# Altium PCB Projekt91_v4.PcbDoc
Units mil, origin at the board's own origin, x right, y up, seen from the top; angles counter-clockwise.
Board outline 5314.96 x 2952.76 mil, 2 copper layers (Top Layer, Bottom Layer); 46 components, 48 nets, 284 pads, 30 vias.
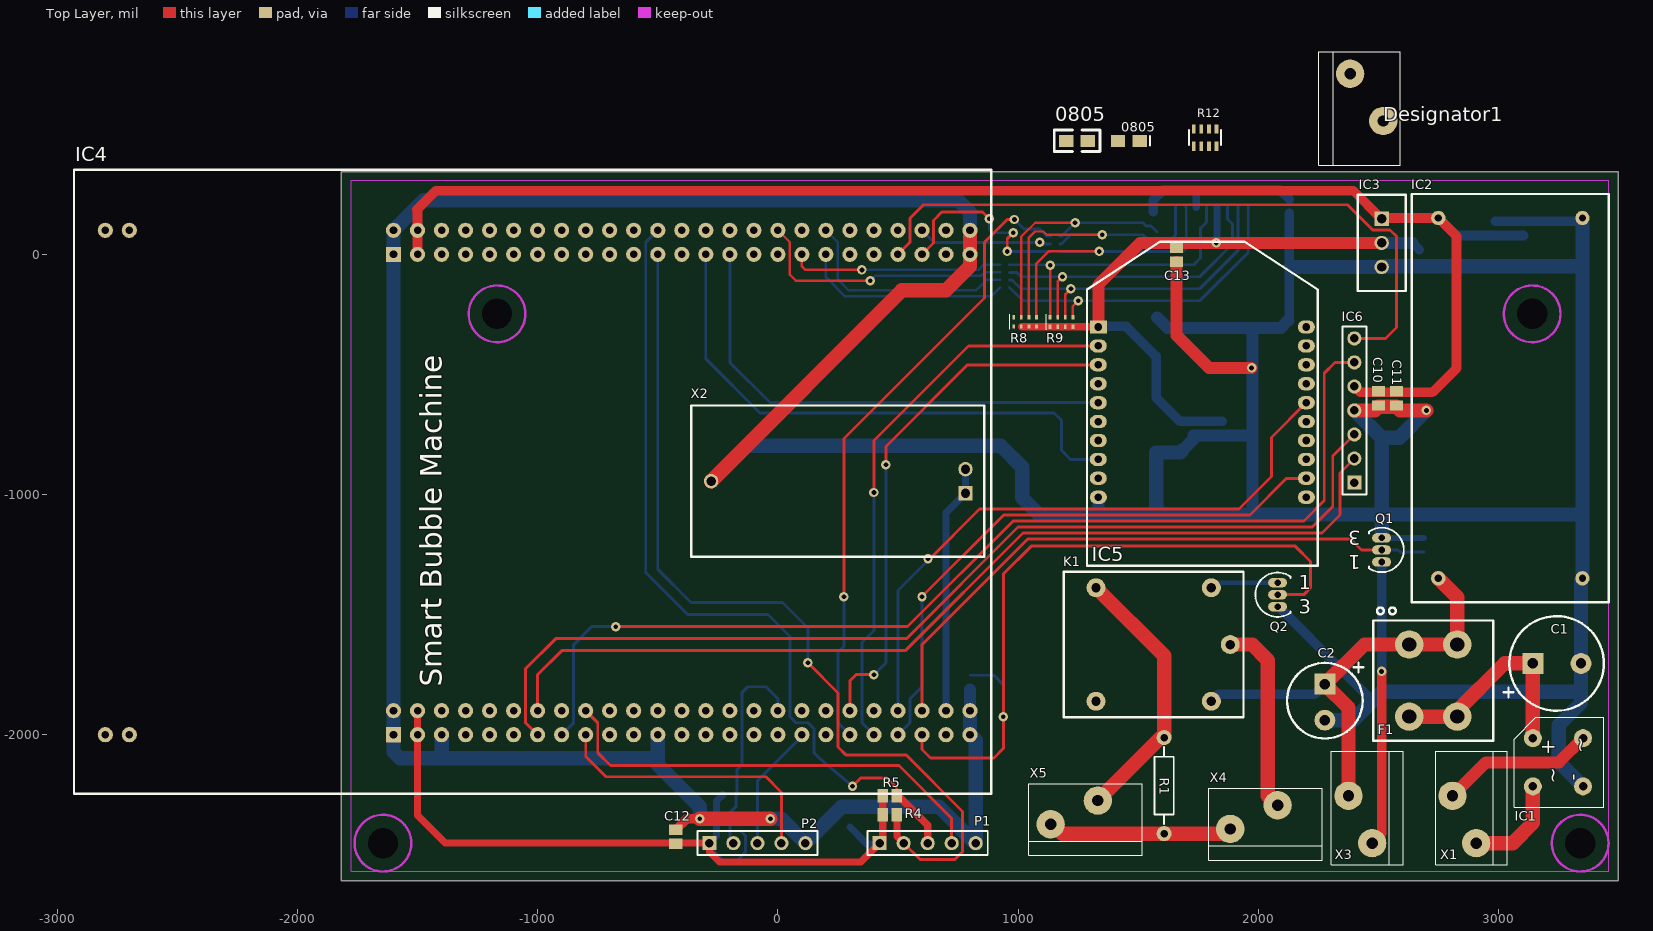
[diagram p0: Top Layer view]
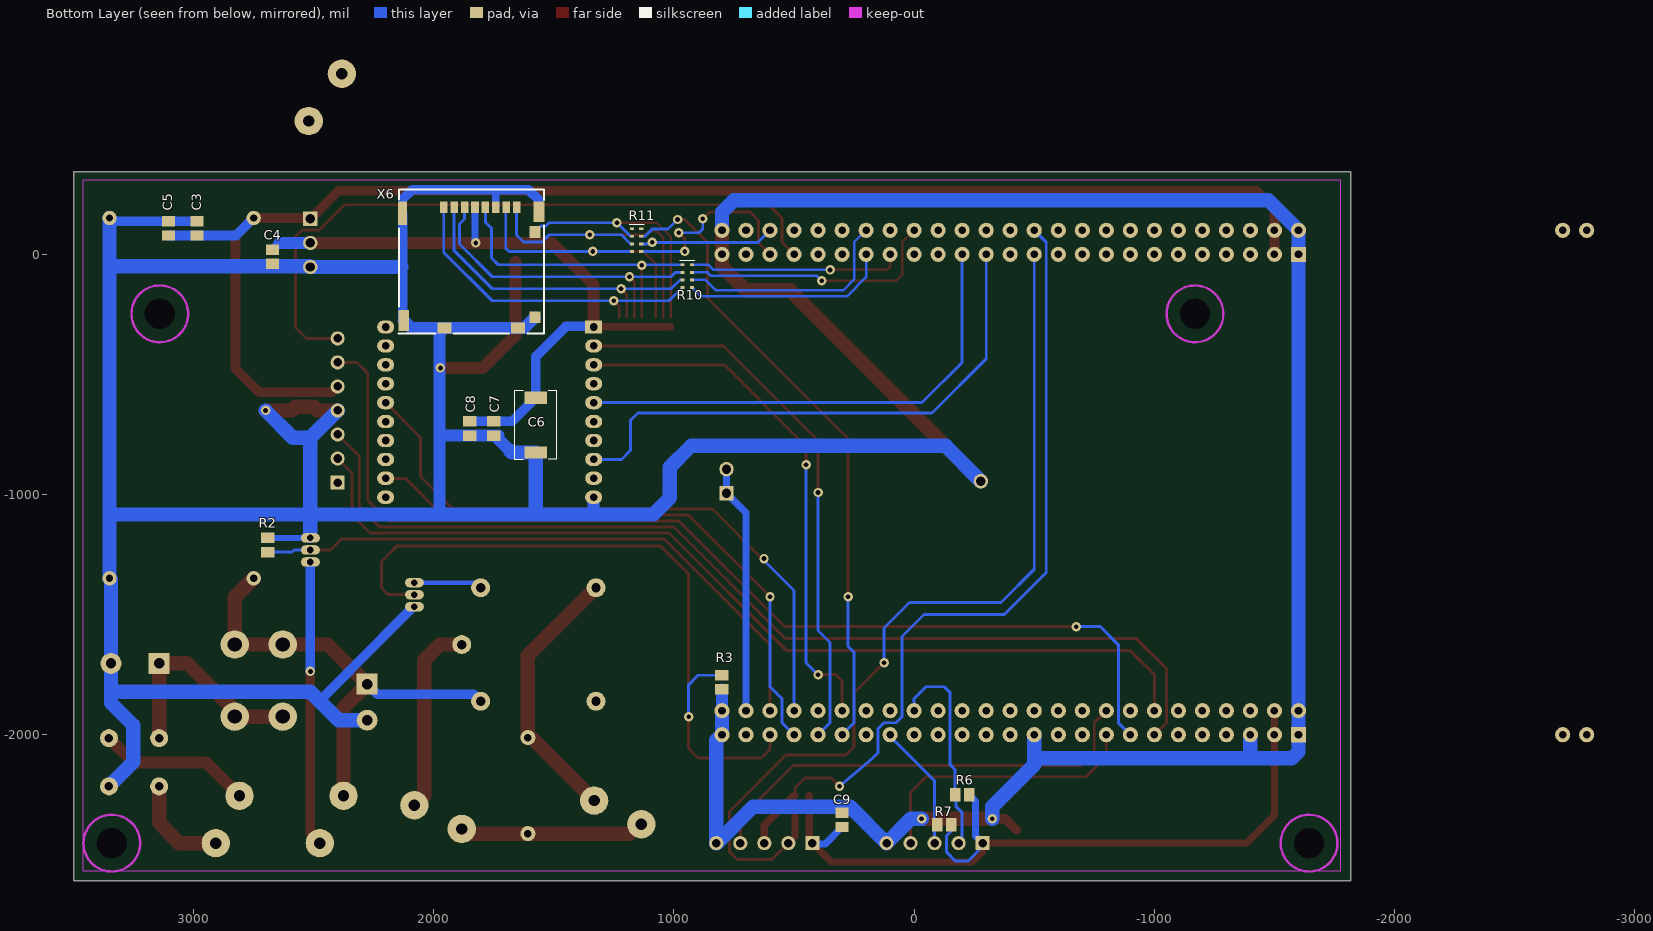
[diagram p1: Bottom Layer view, seen from below]

## Layer stack, top to bottom
Top Layer: signal copper 1.4
Dielectric: dielectric 12.6, FR-4, Dk 4.8
Bottom Layer: signal copper 1.4

## Board outline
-1817.32,-2608.66 -1817.32,344.09 3497.64,344.09 3497.64,-2608.66

## Design rules (kind name [scope] priority, off if disabled: settings)
Clearance 220V [(InNet('220V1') OR InNet('220V2') OR InNet('220V3'))] p1 off: gap=118.11 // 4mm Clearance between 220V tracks
Clearance Clearance_1 [All] p2: gap=8
ComponentClearance [All] p1 off: gap=10 collisioncheckmode=3 verticalgap=10
HoleSize [All] p1: absolutevalues=TRUE maxlimit=1000 minlimit=0.98 maxpercent=80.000 minpercent=20.000
PolygonConnect [All] p1: connectstyle=Relief reliefconductorwidth=10 reliefentries=4 polygonreliefangle="90 Angle"
RoutingVias [All] p1: holewidth=19.68 width=39.37 viastyle="Through Hole" minholewidth=11.81 minwidth=11.81 maxholewidth=196.85 maxwidth=118.11
SolderMaskExpansion [All] p1: expansion=4
TestPointUsage FabricationTestPointUsage [All] p1: valid=0 allowmultiple=FALSE
Testpoint FabricationTestpoint [All] p1: side=3 testpointundercomponent=TRUE minsize=40 maxsize=100 preferedsize=60 minholesize=0 maxholesize=40 preferedholesize=32 testpointgrid=1 style=297 order=0-112345678
Width [All] p1: maxlimit=60 minlimit=10 preferedwidth=10
17 further rules are at their usual default settings.

## Classes and differential pairs
component class Projekt91: C1 C2 C3 C4 C5 C6 C7 C8 C9 C10 C11 C12 C13 F1 IC1 IC2 IC3 IC4 IC5 IC6 K1 P1 P2 Q1 Q2 R1 R2 R3 R4 R5 R6 R7 R8 R9 R10 R11 X1 X2 X3 X4 X5 X6

## Components (designator, comment, footprint, x,y, rotation, side; value= is the part's Value field where it differs from the comment)
0805 "10u" 0805-S 1505.91,472.44 r180 top (schematic designator C3)
0805 "Comment" 0805 1200.79,472.44 r0 top
C1 "Cap Pol1" rad-5 3143.31,-1703.15 r0 top
C2 "100u" RAD-3.5 2277.17,-1789.37 r270 top
C3 "10u" C0805 2985.83,107.87 r90 bottom
C4 "10u" C0805 2670.87,-10.24 r270 bottom
C5 "22u" C0805 3103.94,107.87 r270 bottom
C6 "220u/Ta/low ESR" D_case 1575,-596.65 r270 bottom
C7 "100n" C0805 1750,-725 r90 bottom
C8 "22u" C0805 1850,-725 r90 bottom
C9 "100n" C0805 300,-2354.53 r270 bottom
C10 "10u" c0805 2500,-600 r90 top
C11 "100n" C0805 2575,-600 r90 top
C12 "100n" C0805 -425,-2425 r270 top
C13 "100n" C0805 1660,-1.5 r90 top
Designator1 "PTSA_3.5MM_x2" PTSA_3.5MM_x2 2520,555 r0 top
F1 "FUSE-FPG4, 1.6 AF" FUSE-FPG4 2828.35,-1924.41 r180 top
IC1 "12VDC" graetz2 3143.31,-2214.96 r90 top
IC2 "Regulator 12V5V" regulator 3459.61,-1448.82 r180 top
IC3 "LM1085" TO-220 2513.39,147.24 r0 top
IC4 "STM32F4DISCOVERY" STM32F4DISC_BACK 888.32,-2245.8 r90 top
IC5 "RN_XV_WiFly" RN-XV 1288,-1296.22 r90 top
IC6 "Header 7" HDR1X7 2400,-950 r90 top
K1 "Relay-SPDT" relay 1804.72,-1860.63 r180 top
P1 "Header 5" HDR1X5 423.62,-2451.18 r0 top
P2 "Header 5" HDR1X5 -285.04,-2451.18 r0 top
Q1 "Power nMOS - BS170" to-92 2513.39,-1230.71 r180 top
Q2 "Power nMOS - BS170" to-92 2080.32,-1416.93 r0 top
R1 "1M/500 V" AXIAL-0.4 1607.88,-2211.81 r270 top
R2 "10k" C0805 2690.55,-1210.24 r90 bottom
R3 "10k" C0805 800.79,-1781.89 r270 bottom
R4 "10k" C0805 466.14,-2333.07 r0 top
R5 "10k" C0805 466.14,-2254.33 r0 top
R6 "10k" C0805 -200,-2250 r0 bottom
R7 "10k" C0805 -125,-2375 r0 bottom
R8 "ResNet4" resnet4 982.01,-261.5 r0 top
R9 "ResNet4" resnet4 1133.5,-262.13 r0 top
R10 "ResNet4" resnet4 925,-43.5 r270 bottom
R11 "ResNet4" resnet4 1135.63,106.5 r270 bottom
R12 "EXB38V473JV" RES_NETWORK_x4_0603 1731.3,521.65 r0 top (schematic designator R6)
X1 "PTSA 1.5/2-3,5-Z" PTSA_2.5MM_x2 2808.66,-2254.33 r180 top
X2 "BAT_Holder" BAT_Holder 781.1,-944.49 r180 top
X3 "PTSA 1.5/2-3,5-Z" PTSA_2.5MM_x2 2375.59,-2254.33 r180 top
X4 "PTSA 1.5/2-3,5-Z" PTSA_2.5MM_x2 2080.32,-2293.7 r90 top
X5 "PTSA 1.5/2-3,5-Z" PTSA_2.5MM_x2 1332.28,-2274.02 r90 top
X6 "SD_CARD_MOLEX" MOLEX-MICROSD-503182-1853 1958.07,195.87 r180 bottom

## Footprints (in the part's own frame and the unit in brackets; to place one, negate y for a bottom-side part, rotate by r counter-clockwise, add the part's x,y. Pads: shape width x height; smd on the part's side, far side on the other; paste and mask are expansions set on the pad)
0805 [mil]
  rect 60x50 smd: 1(0,0) 2(90,0)
  silkscreen extent -50,-45 140,45
0805-S [mil]
  rect 60x50 smd: 1(0,0) 2(90,0)
  silkscreen extent -44,-20 -44,20
AXIAL-0.4 [mm] "Axial Device, Thru-Hole; 2 Leads; 0.4 in Pin Spacing"
  round 1.6 hole 0.8: 1(-5.08,0) 2(5.08,0)
  silkscreen extent -4.06,-1.02 4.06,1.02
BAT_Holder [mil] "Holder for CR2032 by Renata"
  rect 60x60 hole 39.37: 1(0,50)
  round 60 hole 39.37: 2(0,-50) 3(1059.06,0)
  silkscreen extent -79,-315 1142,315
C0805 [mm] "Chip Capacitor, Body 2.0x1.3mm, IPC High Density"
  rect 1.1x1.4 smd: 1(-0.75,0) 2(0.75,0)
  body extent -1.1,-0.72 1.1,0.72, height 1.4
c0805 [mm] "Chip Capacitor, Body 2.0x1.3mm, IPC High Density"
  rect 1.1x1.4 smd: 1(-0.75,0) 2(0.75,0)
  body extent -1.1,-0.72 1.1,0.72, height 1.4
D_case [mm]
  rect 1.3x2.4 smd: 1(0,0) 2(5.8,0)
  silkscreen extent -0.75,-2.25 6.55,2.22
FUSE-FPG4 [mm]
  round 3 hole 1.5: 1(0,0) 2(5.08,0) 3(5.08,-7.62) 4(0,-7.62)
  silkscreen extent -3.81,-11.53 8.89,2.54
graetz2 [mm]
  round 1.9 hole 0.9: 1(5.1,0) 2(0,0) 3(0,-5.3) 4(5.1,-5.3)
  silkscreen extent -2.2,-7.5 7.3,2
HDR1X5 [mm] "Connector; Header; 5 Position"
  rect 1.5x1.5 hole 0.9: 1(0,0)
  round 1.5 hole 0.9: 2(2.54,0) 3(5.08,0) 4(7.62,0) 5(10.16,0)
  silkscreen extent -1.27,-1.27 11.43,1.27
HDR1X7 [mm] "Connector; Header; 7 Position"
  rect 1.5x1.5 hole 0.9: 1(0,0)
  round 1.5 hole 0.9: 2(2.54,0) 3(5.08,0) 4(7.62,0) 5(10.16,0) 6(12.7,0) 7(15.24,0)
  silkscreen extent -1.27,-1.27 16.51,1.27
MOLEX-MICROSD-503182-1853 [mm]
  rect 0.8x1.24 smd: 1(0,0) 2(1.1,0) 3(2.2,0) 4(3.3,0) 5(4.4,0) 6(5.5,0) 7(6.6,0) 8(7.7,0)
  rect 1.16x1.25 smd: 9(9.64,-2.63)
  rect 1.16x1.2 smd: 10(9.64,-11.63)
  rect 0.95x2.5 smd: 11(-4.35,-0.63)
  rect 1.15x2.2 smd: 12(10.05,-0.47) 13(-4.24,-11.96)
  rect 1.5x1.15 smd: 14(0.06,-12.76) 15(7.85,-12.75)
  silkscreen extent -4.78,-13.33 10.59,1.87
PTSA_2.5MM_x2 [mm]
  round 3 hole 1.2: 1(0,0) 2(-2.5,5)
  silkscreen extent -5.8,-4.7 1.8,7.3
PTSA_3.5MM_x2 [mm]
  round 3 hole 1.2: 1(0,0) 2(-3.5,5)
  silkscreen extent -6.8,-4.7 1.8,7.3
RAD-3.5 [mm] "Radial 3.5mm; 8mm diameter"
  rect 2.2x2.2 hole 1.1: 1(0,0)
  round 2.2 hole 1.1: 2(3.81,0)
  silkscreen extent -2.27,-4 5.75,4.05
rad-5 [mm] "Radial 5mm; 10mm diameter"
  rect 2.2x2.2 hole 1.1: 1(0,0)
  round 2.2 hole 1.1: 2(5.08,0)
  silkscreen extent -3.09,-5 7.5,5
regulator [mil]
  round 60 hole 30: 1(710,-100) 2(110,-100) 3(710,-1600) 4(110,-1600)
  silkscreen extent 0,-1700 820,0
relay [mm]
  round 2 hole 1: 1(-2,-6) 2(12.2,0) 3(12.2,-12) 4(0,0) 5(0,-12)
  silkscreen extent -3.4,-13.7 15.6,1.7
RES_NETWORK_x4_0603 [mm]
  rect 0.4x1 smd: 1(0,0) 2(0.8,0) 3(1.6,0) 4(2.4,0) 5(2.4,-1.801) 6(1.6,-1.801) 7(0.8,-1.801) 8(0,-1.801)
  silkscreen extent -0.5,-1.7 2.88,-0.1
resnet4 [mm]
  rect 0.3x0.45 smd: 1(0,0) 2(0.8,0) 3(1.6,0) 4(2.4,0) 5(0,-1) 6(0.8,-1) 7(1.6,-1) 8(2.4,-1)
  silkscreen extent -0.4,-1.3 -0.4,0.3
RN-XV [mm] "RN-XV WiFly Pinout"
  rect 1.4x1.8 hole 0.8: 1(25.239,-1.165)
  oval 1.4x1.8 hole 0.8: 2(23.239,-1.165) 3(21.239,-1.165) 4(19.239,-1.165) 5(17.239,-1.165) 6(15.239,-1.165) 7(13.239,-1.165) 8(11.239,-1.165) 9(9.239,-1.165) 10(7.239,-1.168) 11(7.239,-23.165) 12(9.239,-23.165) 13(11.239,-23.165) 14(13.239,-23.165) 15(15.239,-23.165) 16(17.239,-23.165) 17(19.239,-23.165) 18(21.239,-23.165) 19(23.239,-23.165) 20(25.239,-23.165)
  silkscreen extent -0.03,-24.36 34.26,0.03
STM32F4DISC_BACK [mm] "STM32F4Discovery without pins [101..106]"
  rect 1.6x1.6 hole 0.8: 1(6.243,63.203) 51(57.043,63.203)
  round 1.6 hole 0.8: 2(8.783,63.203) 3(6.243,60.663) 4(8.783,60.663) 5(6.243,58.123) 6(8.783,58.123) 7(6.243,55.583) 8(8.783,55.583) 9(6.243,53.043) 10(8.783,53.043) 11(6.243,50.503) 12(8.783,50.503) 13(6.243,47.963) 14(8.783,47.963) 15(6.243,45.423) 16(8.783,45.423) 17(6.243,42.883) 18(8.783,42.883) 19(6.243,40.343) 20(8.783,40.343) 21(6.243,37.803) 22(8.783,37.803) 23(6.243,35.263) 24(8.783,35.263) 25(6.243,32.723) 26(8.783,32.723) 27(6.243,30.183) 28(8.783,30.183) 29(6.243,27.643) 30(8.783,27.643) 31(6.243,25.103) 32(8.783,25.103) 33(6.243,22.563) 34(8.783,22.563) 35(6.243,20.023) 36(8.783,20.023) 37(6.243,17.483) 38(8.783,17.483) 39(6.243,14.943) 40(8.783,14.943) 41(6.243,12.403) 42(8.783,12.403) 43(6.243,9.863) 44(8.783,9.863) 45(6.243,7.323) 46(8.783,7.323) 47(6.243,4.783) 48(8.783,4.783) 49(6.243,2.243) 50(8.783,2.243) 52(59.583,63.203) 53(57.043,60.663) 54(59.583,60.663) 55(57.043,58.123) 56(59.583,58.123) 57(57.043,55.583) 58(59.583,55.583) 59(57.043,53.043) 60(59.583,53.043) 61(57.043,50.503) 62(59.583,50.503) 63(57.043,47.963) 64(59.583,47.963) 65(57.043,45.423) 66(59.583,45.423) 67(57.043,42.883) 68(59.583,42.883) 69(57.043,40.343) 70(59.583,40.343) 71(57.043,37.803) 72(59.583,37.803) 73(57.043,35.263) 74(59.583,35.263) 75(57.043,32.723) 76(59.583,32.723) 77(57.043,30.183) 78(59.583,30.183) 79(57.043,27.643) 80(59.583,27.643) 81(57.043,25.103) 82(59.583,25.103) 83(57.043,22.563) 84(59.583,22.563) 85(57.043,20.023) 86(59.583,20.023) 87(57.043,17.483) 88(59.583,17.483) 89(57.043,14.943) 90(59.583,14.943) 91(57.043,12.403) 92(59.583,12.403) 93(57.043,9.863) 94(59.583,9.863) 95(57.043,7.323) 96(59.583,7.323) 97(57.043,4.783) 98(59.583,4.783) 99(57.043,2.243) 100(59.583,2.243) 101(6.243,91.143) 102(6.243,93.683) 103(59.583,91.143) 104(59.583,93.683)
  silkscreen extent -0.01,-0.01 65.99,96.99
to-92 [mm] "TO, Flat Index; 3 In-Line, Axial Leads; Body Dia. 4.6mm; Leads 0.41 x 0.39 mm (max)"
  oval 2x1 hole 0.7: 1(0,1.27) 2(0,0) 3(0,-1.27)
  silkscreen extent -2.34,-2.34 1.35,2.34
TO-220 [mil]
  rect 60x60 hole 39.37: 1(0,0)
  round 60 hole 39.37: 2(0,-100) 3(0,-200)
  silkscreen extent -100,-300 100,100

## Part data
0805 C5 C7 C8 C9 C10 C11 C12 C13: library part Cap, "Capacitor"
C1: "Polarized Capacitor (Radial)"
C2 C6: library part "Cap Pol1", "Polarized Capacitor (Radial)"
C3 C4: library part "Cap Pol3", "Polarized Capacitor (Surface Mount)"
F1: library part FUSE-FPG4
IC1: library part Bridge2, "Diode Bridge"
IC2: library part Regulator
IC4: library part STM32F4DISC_w/o[101..106]
IC6: "Header, 7-Pin"
K1: "Single-Pole Dual-Throw Relay"
P1 P2: "Header, 5-Pin"
Q1 Q2: library part MOSFET-N, "N-Channel MOSFET"
R1 R2 R3 R4 R5 R6 R7: library part Res2, "Resistor"
R12: library part RES_NETWORK_x4
X1 X3 X4 X5: library part "Header 2", "Header, 2-Pin"

## Free pads (board coordinates)
  round 118.11 hole 125.98: 0(-1644.09,-2451.18) 0(-1169.09,-247.83) 0(3140.16,-247.83) 0(3340.16,-2451.18) 0(3340.16,-2451.18)

## Via types
v1: diameter 39.37, hole 19.68, Top Layer to Bottom Layer, 30 vias

## Nets (pads, with @x,y where several pads share a name; then routed paths per layer and width w, separated by ;. In a path a pad name is that pad's centre, name@x,y a point inside that pad or via, vN(x,y) a via of type N, cw(c..) or ccw(c..) an arc to the next point about the centre after c; other vN are vias at no path point)
220V1: K1.1 X4.1 | length 804.1
  Top Layer w60: K1.1 1974.41,-1624.41 2040,-1690 2040,-2253.39 X4.1
220V2: R1.2 X4.2 X5.2 | length 772.5
  Top Layer w60: X5.2 1145.28,-2372.44 1184.65,-2411.81 R1.2 1863.78,-2411.81 X4.2
220V3: K1.3 R1.1 X5.1 | length 1112.7
  Top Layer w60: K1.3 1607.87,-1671.65 R1.1@1607.87,-1999.3 ; X5.1 1594.49,-2011.81 R1.1
+3.3V: C9.2 C12.2 IC4.3 IC4.4 P1.1 P2.1 R4.1 R5.1 R6.1 R7.1 | length 3373.8
  Top Layer w30: IC4.4 -1500,-2335.43 -1384.25,-2451.18 P2.1 -285.04,-2487.4 -242.52,-2529.92 344.88,-2529.92 436.61,-2438.19 R5.1
  Bottom Layer w12: P2.1@-285.04,-2464.96 -225,-2525 -171.02,-2525 -135.51,-2489.49 -135.51,-2419.49 R7.1@-154.53,-2400.47
  Bottom Layer w20: P2.1@-285.04,-2464.96 P2.1
  Bottom Layer w30: P2.1 -255,-2421.14 -255,-2275.47 R6.1 ; C9.2 370.47,-2454.53 420.28,-2454.53 P1.1
+3.3V-WIFLY: C4.1 C6.1 C7.2 C8.2 C13.2 IC3.2 IC5.1 R8.6 R8.7 R8.8 R9.5 R9.6 R9.7 R9.8 X6.4 | length 2843.7
  Top Layer w30: R8.6@1014.13,-301.5 R9.5 R9.6 R9.7 R9.8 1332.8,-301.5 IC5.1
  Top Layer w50: IC5.1 1333.86,-126.77 1507.87,47.24 v1(1825,47.24) IC3.2
  Bottom Layer w30: v1@1828.15,50.39 X6.4
  Bottom Layer w39.37: 2642.91,47.24 C4.1
  Bottom Layer w40: IC5.1 1336.42,-300 1450,-300 1575,-425 C6.1 1673.82,-695.47 C7.2 C8.2
  Bottom Layer w50: IC3.2 2642.91,47.24
+5V: C3.1 C5.2 C10.2 C11.2 IC2.3 IC3.1 IC4.53 IC4.54 IC6.5 | length 6035.8
  Top Layer w40: IC4.53@-1502.36,2.36 IC4.53 -1500,184.25 ; -1502.36,186.61 -1423.62,265.35 2395.28,265.35 IC3.1 ; IC6.5 2425,-575 2725,-575 2825,-475 2825,75.79 IC2.3 IC3.1@2517.32,151.18
  Bottom Layer w40: IC2.3 2822.44,78.35 C5.2
+12V: C2.1 F1.3 F1.4 IC2.1 K1.4 X3.1 | length 1935.4
  Top Layer w60: X3.1 2375.59,-1887.8 C2.1 2442.13,-1624.41 F1.4 2828.35,-1427.56 IC2.1
  Bottom Layer w40: K1.4 1834.25,-1831.1 2235.43,-1831.1 C2.1
GND: C1.2 C2.2 C3.2 C4.2 C5.1 C6.2 C7.1 C8.1 C9.1 C10.1 C11.1 C12.1 C13.1 IC1.3 IC2.2 IC2.4 IC3.3 IC4.1 IC4.2 IC4.5 IC4.23 IC4.49 IC4.50 IC4.51 IC4.52 IC4.99 IC4.100 IC5.10 IC6.4 P1.5 P2.5 Q1.3 Q2.3 R2.2 R3.2 X2.3 X6.6 X6.10 X6.11 X6.12 X6.13 X6.14 X6.15 | length 24881
  Top Layer w40: C12.1 -379.53,-2350 v1(-325,-2350)
  Top Layer w50: C13.1 1660,-337.95 1794.88,-472.83 v1(1972.05,-472.83)
  Top Layer w60: v1(-325,-2350) v1(-31.04,-2350) ; X2.3 516.54,-150 700,-150 800,-50 IC4.99 IC4.100 ; IC6.4 2485,-650 2500,-635 2575,-635 2590,-650 v1(2700,-650)
  Bottom Layer w25: Q1.3 R2.2
  Bottom Layer w30: X6.6 1741.54,265.04 ; X6.13 X6.13@2129.33,-270.67 ; Q1.3 Q1.3@2518.7,-1186.02
  Bottom Layer w40: X6.12 1562.4,225.91 1605,268.5 2090,268.5 2129.33,229.17 ; Q2.3 2083.76,-1466.93 2350.47,-1733.64 2350.47,-1735.12 2475,-1859.65 ; X6.13@2129.33,-270.67 X6.11 ; C3.2 3335.83,137.4 IC2.4
  Bottom Layer w50: IC4.50 800.79,-1899.21 R3.2 ; 1332.28,-1083.07 1334,-1081.36 IC5.10 ; X6.10 1623.03,-306.5 2093.5,-306.5 X6.13 ; 1682.44,-817.76 1735.83,-764.37 C7.1@1735.83,-758.27 ; C7.1@1729.73,-754.53 1970.47,-754.53 1975,-750 ; X6.14 1975,-325.79 1975,-1083.07
  Bottom Layer w60: -1402.36,-2098.66 -1400,-2096.3 IC4.5 ; -500,-2098.66 -1572.36,-2098.66 -1600,-2071.02 IC4.1 IC4.52 -1475,225 750,225 800,175 IC4.100 ; IC4.23 -500,-2125 -325,-2300 v1(-325,-2350) ; X2.3 -131.1,-797.64 928.74,-797.64 1017.32,-886.22 1017.32,-1014.17 1086.22,-1083.07 3349.61,-1083.07 ; v1(-31.04,-2350) 13.78,-2350 P2.5 266.14,-2300 670.77,-2300 821.95,-2451.18 P1.5 823.62,-2023.62 IC4.49 IC4.50 ; 1568.5,-1083.07 1575,-1076.58 C6.2 1675.2,-825 1682.44,-817.76 ; 2135.59,-52.76 IC3.3 2516.54,-49.61 3340.16,-49.61 ; C2.2 2395.28,-1939.37 2513.39,-1821.26 3343.31,-1821.26 ; IC6.4 2513.39,-763.39 ; Q1.3@2513.39,-1171.02 2513.39,-763.39 ; v1(2700,-650) 2586.61,-763.39 2513.39,-763.39 ; IC2.2@3343.31,-1355.12 3343.31,-1868.03 3250,-1961.34 3250,-2112.99 IC1.3 ; IC2.2 IC2.4
GPIO_HC_KEY: IC4.15 IC6.6 | length 4442.9
  Top Layer w12: v1(-675,-1550) 540,-1550 980,-1110 2190,-1110 2274.75,-1025.25 2274.75,-495.25 2320,-450 IC6.6
  Bottom Layer w12: IC4.15 -850,-1950 -850,-1625 -775,-1550 v1(-675,-1550)
GPIO_HC_RESET: IC4.93 IC6.7 | length 2847.1
  Top Layer w12: IC4.93 550,50 550,150 606.34,206.34 2371.66,206.34 2476.76,101.24 2548.76,101.24 2575,75 2575,-305 2530,-350 IC6.7
GPIO_HC_SATE: IC4.16
GPIO_HC_STATE: IC6.1
GPIO_RDY_1: IC4.18 P1.4 | length 1885.2
  Top Layer w12: IC4.18 -750,-1950 -750,-2075 -696.34,-2128.66 503.66,-2128.66 723.62,-2348.62 P1.4
GPIO_RDY_2: IC4.17 P2.4 | length 1178.9
  Top Layer w12: IC4.17 -800,-2091.02 -716.02,-2175 -50,-2175 14.96,-2239.96 P2.4
MOTOR_MAIN_ON: IC4.45 Q2.2 R3.1 | length 3056.9
  Top Layer w12: IC4.45 600,-2061.02 635.83,-2096.85 899.21,-2096.85 938.58,-2057.48 938.58,-1331.42 1055,-1215 2153.98,-1215 2217.64,-1278.66 2217.64,-1388.66 2189.37,-1416.93 Q2.2
  Bottom Layer w12: R3.1 899.21,-1752.36 938.58,-1791.73 v1(938.58,-1925)
NetC1_1: C1.1 F1.1 F1.2 IC1.1 | length 931.9
  Top Layer w60: F1.2 F1.1 2828.35,-1900 3025.2,-1703.15 C1.1 IC1.1
NetIC1_2: IC1.2 X1.2 | length 442.6
  Top Layer w60: X1.2@2887.4,-2451.18 3058.82,-2451.18 3143.31,-2366.69 IC1.2
NetIC1_4: IC1.4 X1.1 | length 642.8
  Top Layer w50: X1.1 2947.99,-2115 3251.14,-2115 IC1.4
NetK1_5: K1.5 Q2.1 | length 314.5
  Bottom Layer w12: K1.5 K1.5@1811.67,-1381.24 ; Q2.1@2066,-1381.24 Q2.1
  Bottom Layer w20: K1.5 1825.98,-1366.93 Q2.1
NetQ1_1: Q1.1 X3.2 | length 1186.8
  Top Layer w40: X3.2 2513.39,-2411.81 v1(2513.39,-1736.41)
  Bottom Layer w40: v1(2513.39,-1736.41) Q1.1
NetR8_2: R8.2 R11.6 X6.9 | length 1026.1
  Top Layer w10: R8.2 1013.5,73.5 1071.5,131.5 v1(1237.39,131.5)
  Bottom Layer w12: R11.6 1180.89,75 v1(1237.39,131.5) 1519.7,131.5 1533.14,118.06 1552.81,118.06 X6.9
NetR8_3: R8.3 R11.7 X6.8 | length 1288.1
  Top Layer w10: R8.3 1045,70 1070,95 1105,95 1118.5,81.5 v1(1350,81.5)
  Bottom Layer w12: R11.7 1180.9,43.5 1218.89,81.5 1519.3,81.5 1549.08,51.72 1626.72,51.72 1654.92,79.92 X6.8
NetR8_4: R8.4 R11.8 X6.7 | length 1207
  Top Layer w10: R8.4 1076.5,-38.5 1127.01,12.01 v1(1337.64,12.01)
  Bottom Layer w12: R11.8 1687.01,12.01 1700,25 1700,194.09 X6.7
NetR9_1: R9.1 R10.5 X6.5 | length 1245.7
  Top Layer w10: R9.1 v1(1133.5,-45)
  Bottom Layer w12: R10.5 1731.5,-43.5 1760,-15 1760,108.5 1784.84,133.35 X6.5
NetR9_2: R9.2 R10.6 X6.3 | length 1331.3
  Top Layer w12: R9.2 1165,-113.5 v1(1185,-93.5)
  Bottom Layer w12: R10.6 993.5,-75 1012.01,-93.5 1756.5,-93.5 1892.76,42.76 1892.76,125.74 1871.46,147.05 X6.3
NetR9_3: R9.3 R10.7 X6.2 | length 1340.7
  Top Layer w12: R9.3 1196.5,-167.01 v1(1220,-143.5)
  Bottom Layer w12: R10.7 975,-106.5 1012.01,-143.5 1756.5,-143.5 1914.76,14.76 X6.2
NetR9_4: R9.4 R10.8 X6.1 | length 1365.7
  Top Layer w10: R9.4 1227.99,-215.51 v1(1250,-193.5)
  Bottom Layer w12: R10.8 1019.88,-193.5 1756.5,-193.5 1958.07,8.07 X6.1
PWM: IC4.46 Q1.2 R2.1 | length 2570.5
  Top Layer w12: IC4.46 600,-1625 1040,-1185 2383.98,-1185 2429.69,-1230.71 Q1.2
  Bottom Layer w12: Q1.2 2580.71,-1230.71 2589.76,-1239.76 R2.1
SCL_1: IC4.73 P1.2 R4.2 | length 3798.1
  Top Layer w12: v1(125,-1700) 250.75,-1825.75 250.75,-2050.75 285,-2085 535,-2085 769.15,-2319.15 769.15,-2487.15 737.64,-2518.66 591.1,-2518.66 P1.2
  Top Layer w30: R4.2 495.67,-2423.23 P1.2
  Bottom Layer w12: IC4.73 -500,-1311.02 -361.02,-1450 18.98,-1450 125,-1556.02 v1(125,-1700)
SCL_2: IC4.34 P2.2 R6.2 | length 882.3
  Bottom Layer w12: P2.2 -200,-2436.22 -200,-2325 -175,-2300 R6.2@-175,-2250 ; R6.2 -170.47,-2220.47 -170.47,-2145.47 -150,-2125 -150,-1825 -125,-1800 -50,-1800 0,-1850 IC4.34
SD_CD: IC4.39 R11.2 | length 2667.4
  Top Layer w12: v1(275,-1425) 275,-767 860,-182 860,50 955,145 v1(985,145)
  Bottom Layer w12: v1(275,-1425) 275,-1631.3 250,-1656.3 250,-1950 IC4.39 ; v1(985,145) 1025,105 1090,105 1120,75 R11.2
SDA_1: IC4.74 P1.3 R5.2 | length 3421.6
  Top Layer w12: v1(310.77,-2214.23) 345,-2180 455,-2180 495,-2220 R5.2@495,-2250
  Top Layer w30: R5.2 501.5,-2254.33 623.62,-2376.46 P1.3
  Bottom Layer w12: IC4.74 -550,50 -550,-1325 -375,-1500 -41.02,-1500 50,-1591.02 50,-1925 75,-1950 125,-1950 150,-1975 150,-2075 175,-2100 v1(310.77,-2214.23)
SDA_2: IC4.35 P2.3 R7.2 | length 527.8
  Bottom Layer w12: P2.3 -85.04,-2191.15 100,-2006.11 IC4.35
SDIO_CK: IC4.85 R10.1 | length 890.1
  Top Layer w10: IC4.85 100,-50 115,-65 v1(350,-65)
  Bottom Layer w10: v1(350,-65) 835,-65 856.5,-43.5 R10.1
SDIO_CMD: IC4.84 R10.2 | length 1105.6
  Top Layer w10: IC4.84 50,50 50,-85 75,-110 v1(385,-110)
  Bottom Layer w10: v1(385,-110) 405,-90 845,-90 860,-75 R10.2
SDIO_D0: IC4.95 R11.4 | length 845.2
  Top Layer w12: IC4.95 647.64,47.64 647.64,141.34 682.64,176.34 852.17,176.34 v1(880,148.5) ; v1(955,12.01) 955,65 v1(980,90)
  Bottom Layer w12: v1(880,148.5) 880,105 895,90 v1(980,90) v1@975,85 ; v1(955,12.01) R11.4
SDIO_D1: IC4.96 R11.3 | length 560
  Bottom Layer w12: IC4.96 651.18,48.82 866.18,48.82 867.36,50 v1(1090,50) 1096.5,43.5 R11.3
SDIO_D2: IC4.87 R10.4 | length 868.5
  Bottom Layer w10: IC4.87 200,-95 280,-175 887.99,-175 R10.4
SDIO_D3: IC4.88 R10.3 | length 937.4
  Bottom Layer w10: IC4.88 250,50 250,-105 295,-150 825,-150 868.5,-106.5 R10.3
USART2_RX: IC4.13 IC6.3 | length 4272.6
  Top Layer w12: IC4.13 -1050,-1950 -1050,-1725 -925,-1600 535,-1600 1000,-1135 2225,-1135 2310,-1050 2310,-840 IC6.3
USART2_TX: IC4.14 IC6.2 | length 4025.3
  Top Layer w12: IC4.14 -1000,-1750 -900,-1650 530,-1650 1020,-1160 2265,-1160 2340,-1085 2340,-910 IC6.2
USART3_CTS: IC4.43 IC5.12 | length 2437.6
  Top Layer w12: v1(600,-1425) 940,-1085 1965,-1085 2117.52,-932.48 IC5.12 IC5.12@2200,-949.62
  Bottom Layer w12: IC4.43 550,-1950 550,-1850 600,-1800 v1(600,-1425)
USART3_RTS: IC4.44 IC5.16 | length 2616.8
  Top Layer w12: v1@626.75,-1273.25 840,-1060 1920,-1060 2055,-925 2055,-762.52 IC5.16
  Bottom Layer w12: IC4.44 500,-1400 v1@625,-1275
  other v1: 625,-1266.5
USART3_RX: IC4.41 IC5.2 | length 2370.4
  Top Layer w12: v1(400,-991.5) 400,-775 793.7,-381.3 IC5.2
  Bottom Layer w12: IC4.41 350,-1950 350,-1616.3 400,-1566.3 v1(400,-991.5) v1@405,-986.5
USART3_TX: IC4.40 IC5.3 | length 2230.7
  Top Layer w12: IC4.40 300,-1775 325,-1750 v1(400,-1750) ; v1(450,-876.5) 450,-800 789.96,-460.04 IC5.3
  Bottom Layer w12: v1(400,-1750) 450,-1700 v1(450,-876.5)
VBAT: IC4.48 X2.1 X2.2 | length 1039.1
  Bottom Layer w30: IC4.48 700,-1075.59 X2.1 X2.2
WIFLY_ADHOC: IC4.77 IC5.8 | length 2315.5
  Bottom Layer w12: IC4.77 -300,-435 -75,-660 1150,-660 1180,-690 1180,-815 1218.74,-853.74 IC5.8
WIFLY_RESET: IC4.79 IC5.5 | length 2053.2
  Bottom Layer w12: IC4.79 -200,-450 -32.48,-617.52 IC5.5
pads on no net: 0805.1 0805.2 Designator1.1 Designator1.2 IC4.6 IC4.7 IC4.8 IC4.9 IC4.10 IC4.11 IC4.12 IC4.19 IC4.20 IC4.21 IC4.22 IC4.24 IC4.25 IC4.26 IC4.27 IC4.28 IC4.29 IC4.30 IC4.31 IC4.32 IC4.33 IC4.36 IC4.37 IC4.38 IC4.42 IC4.47 IC4.55 IC4.56 IC4.57 IC4.58 IC4.59 IC4.60 IC4.61 IC4.62 IC4.63 IC4.64 IC4.65 IC4.66 IC4.67 IC4.68 IC4.69 IC4.70 IC4.71 IC4.72 IC4.75 IC4.76 IC4.78 IC4.80 IC4.81 IC4.82 IC4.83 IC4.86 IC4.89 IC4.90 IC4.91 IC4.92 IC4.94 IC4.97 IC4.98 IC4.101 IC4.102 IC4.103 IC4.104 IC5.4 IC5.6 IC5.7 IC5.9 IC5.11 IC5.13 IC5.14 IC5.15 IC5.17 IC5.18 IC5.19 IC5.20 K1.2 R8.1 R8.5 R11.1 R11.5 R12.1 R12.2 R12.3 R12.4 R12.5 R12.6 R12.7 R12.8

## Keep-outs
Keep-Out Layer:
  circle w10: c-1644.09,-2451.18 r118.11
  circle w10: c-1169.09,-247.83 r118.11
  circle w10: c3140.16,-247.83 r118.11
  circle w10: c3340.16,-2451.18 r118.11
  circle w10: c3340.16,-2451.18 r118.11
  lines w3.94: -1775,-2569.29 3458.27,-2569.29 3458.27,308.66 -1775,308.66 -1775,-2569.29

## Silkscreen, mask and mechanical layers (free items; w line width, h text height)
Top Overlay:
  text "Smart Bubble Machine" at -1400,-1800 h90 r90
Mechanical 1:
  the board outline again, w1

## Dimensions
3497.64,344.09 to 3497.64,-2608.66 on Mechanical 2
3497.64,-2608.66 to -1817.32,-2608.66 on Mechanical 2

## Text inside footprints (layer, text, board x,y; h text height)
IC1: Top Overlay "~" at 3253.54,-2203.15 h60 r90; Top Overlay "~" at 3367.72,-2077.17 h60 r90; Top Overlay "+" at 3233.86,-2085.04 h60 r90; Top Overlay "-" at 3336.22,-2191.34 h60 r90
Q1: Top Overlay "1" at 2425.83,-1252.76 h59.05 r180; Top Overlay "3" at 2425.83,-1150.59 h59.05 r180
Q2: Top Overlay "3" at 2167.87,-1497.05 h59.05; Top Overlay "1" at 2167.87,-1394.88 h59.05